# Altium PCB Embedded_board.PcbDoc (part 1 of 2)
Units mil, origin at the board's own origin, x right, y up, seen from the top; angles counter-clockwise.
Board outline 9840 x 5512.03 mil, 4 copper layers (Top Layer, Ground, Power, Bottom Layer); 264 components, 205 nets, 936 pads, 244 vias.
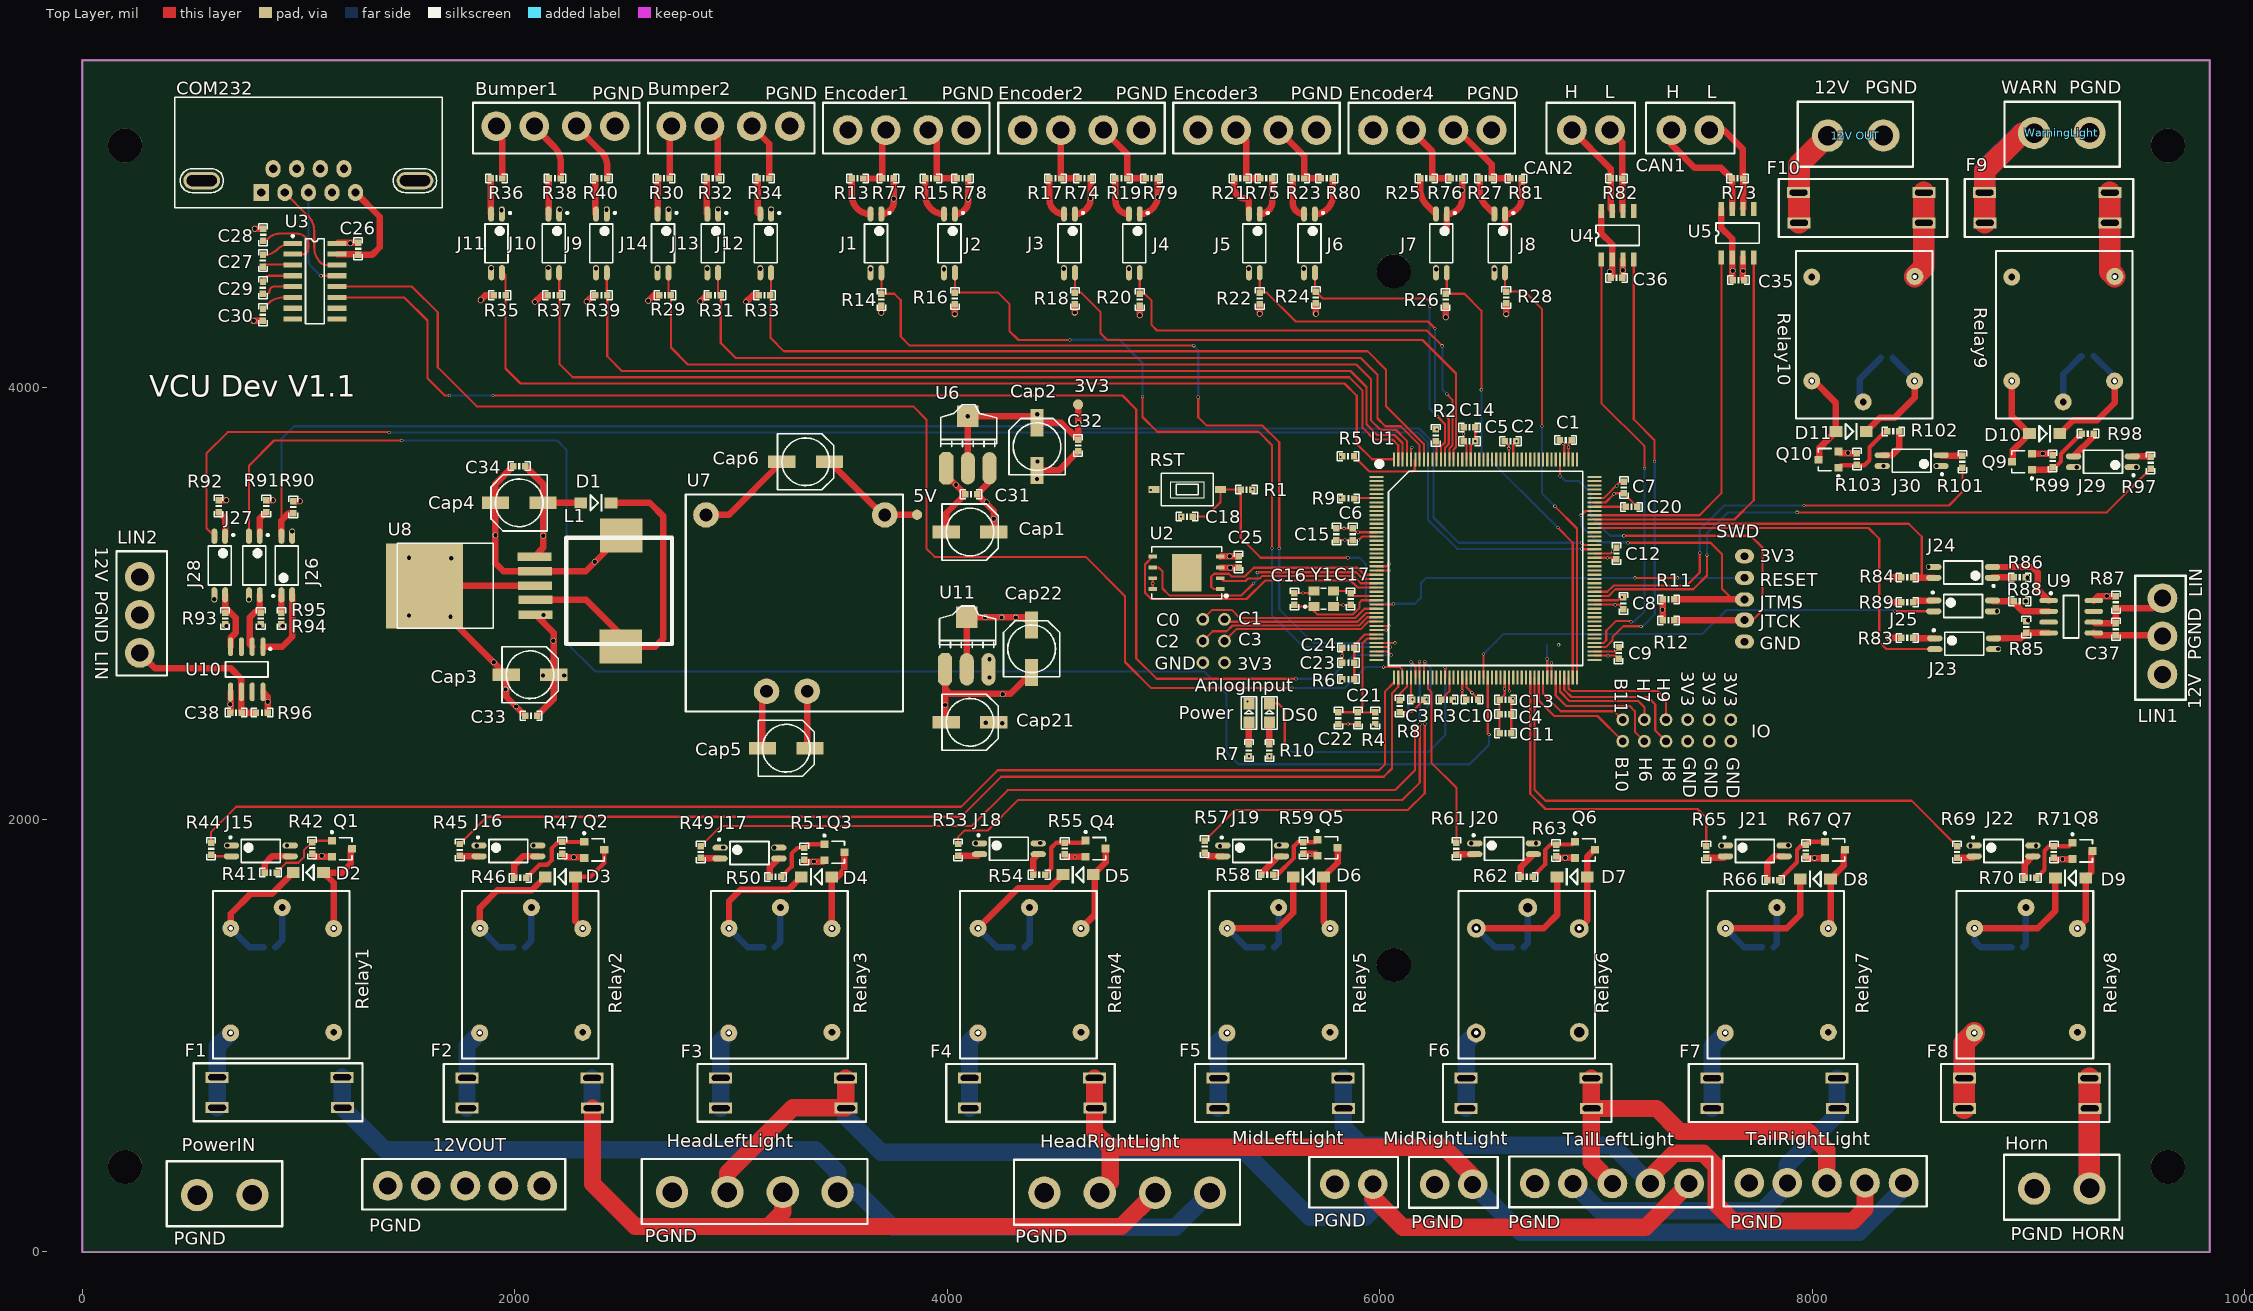
[diagram p0: Top Layer view]
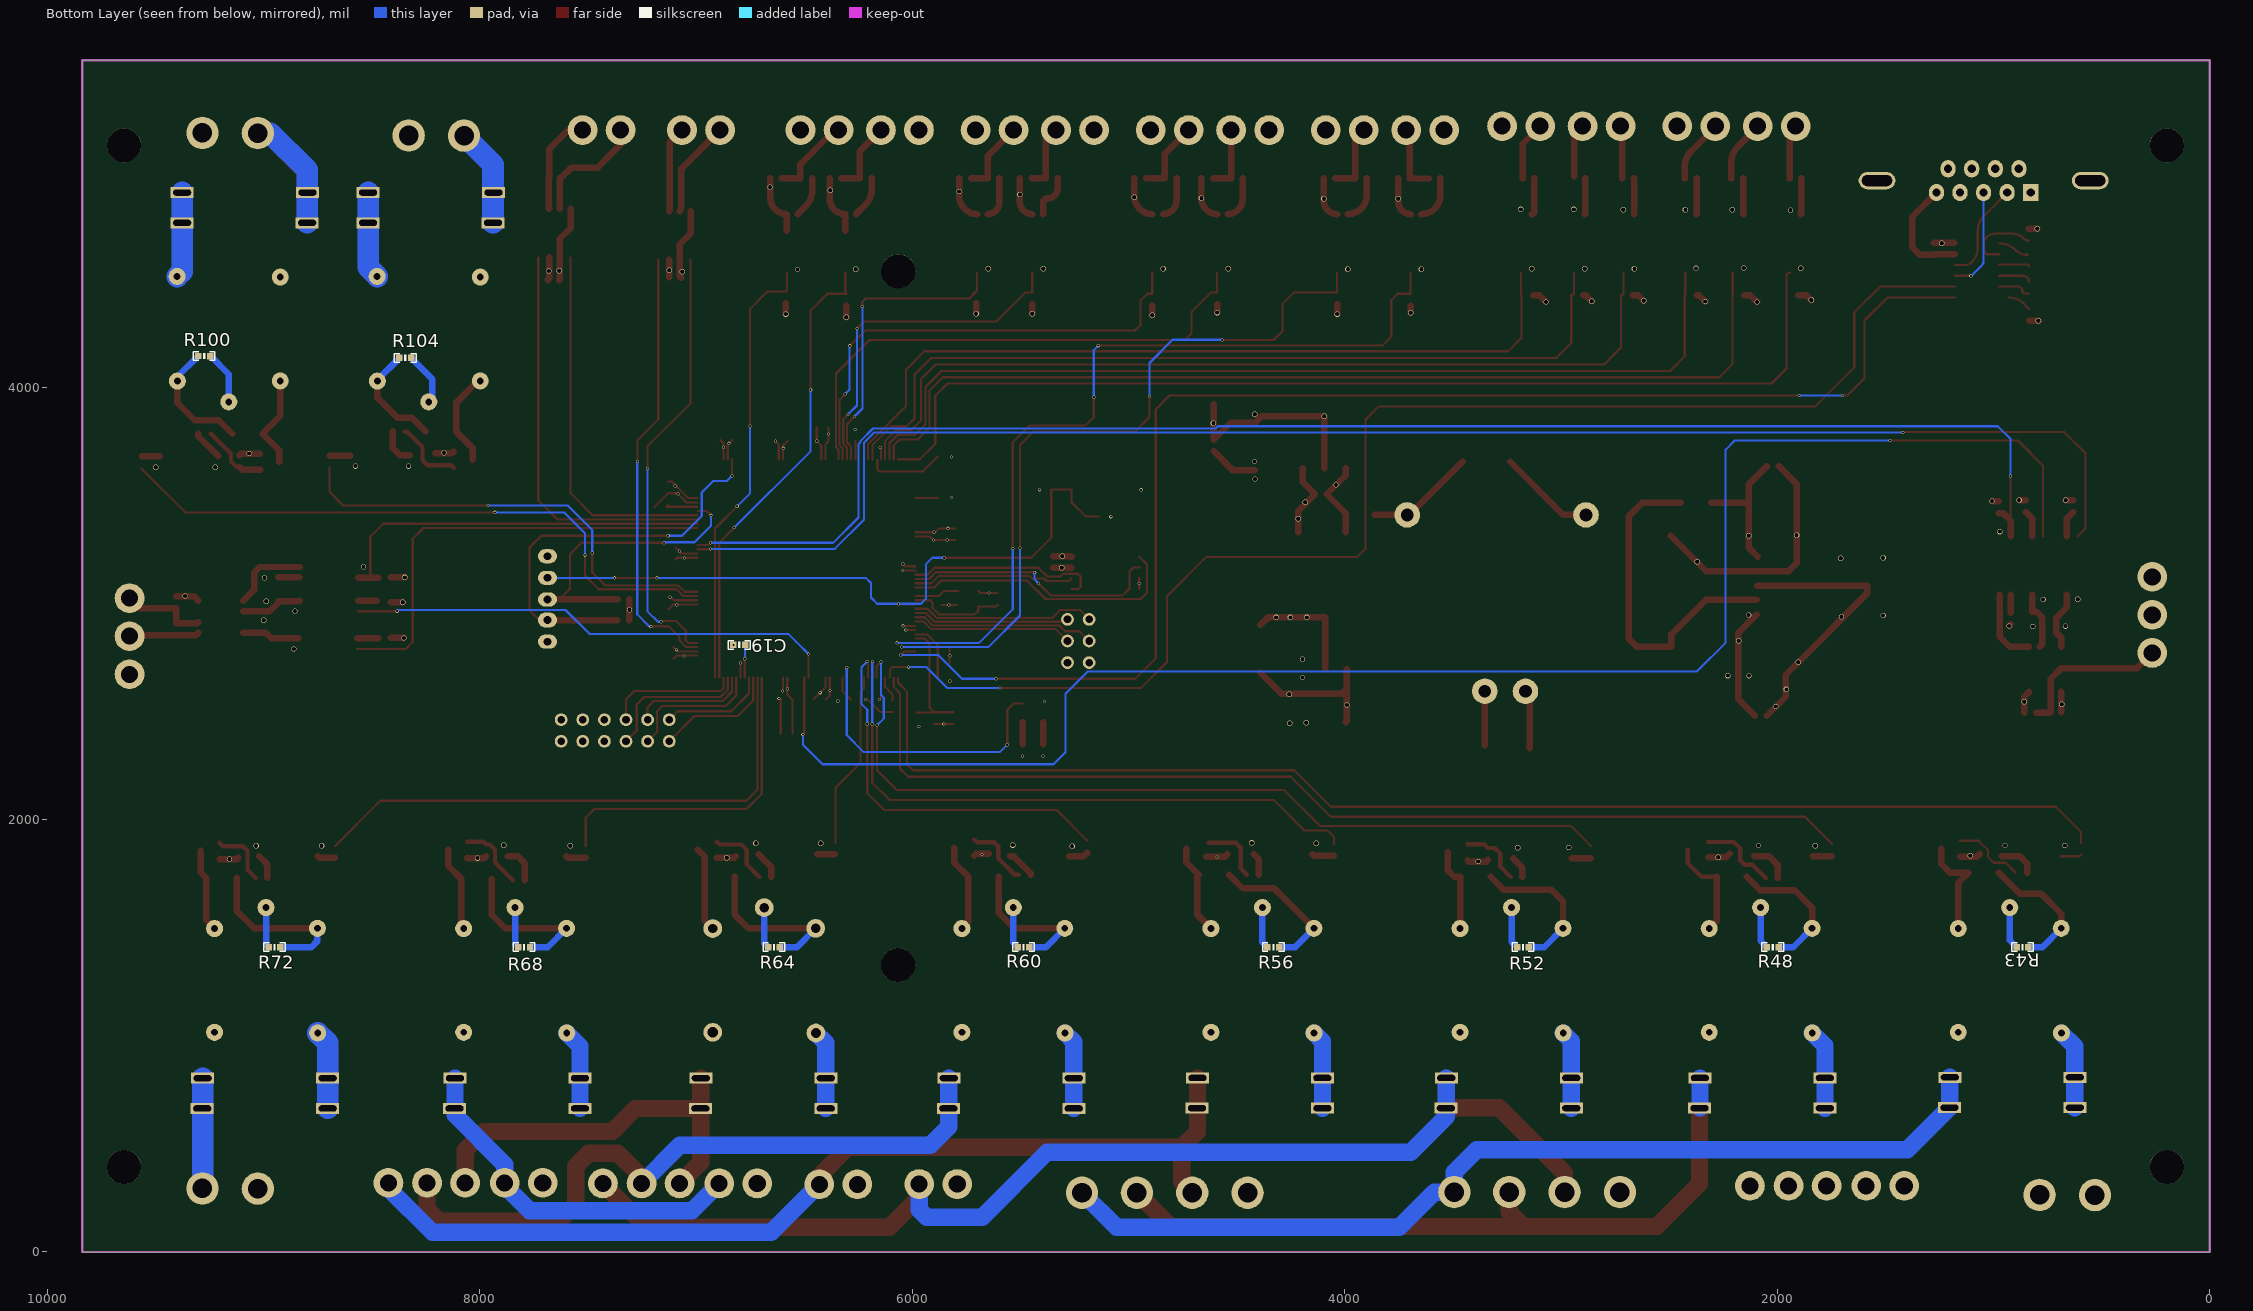
[diagram p1: Bottom Layer view, seen from below]
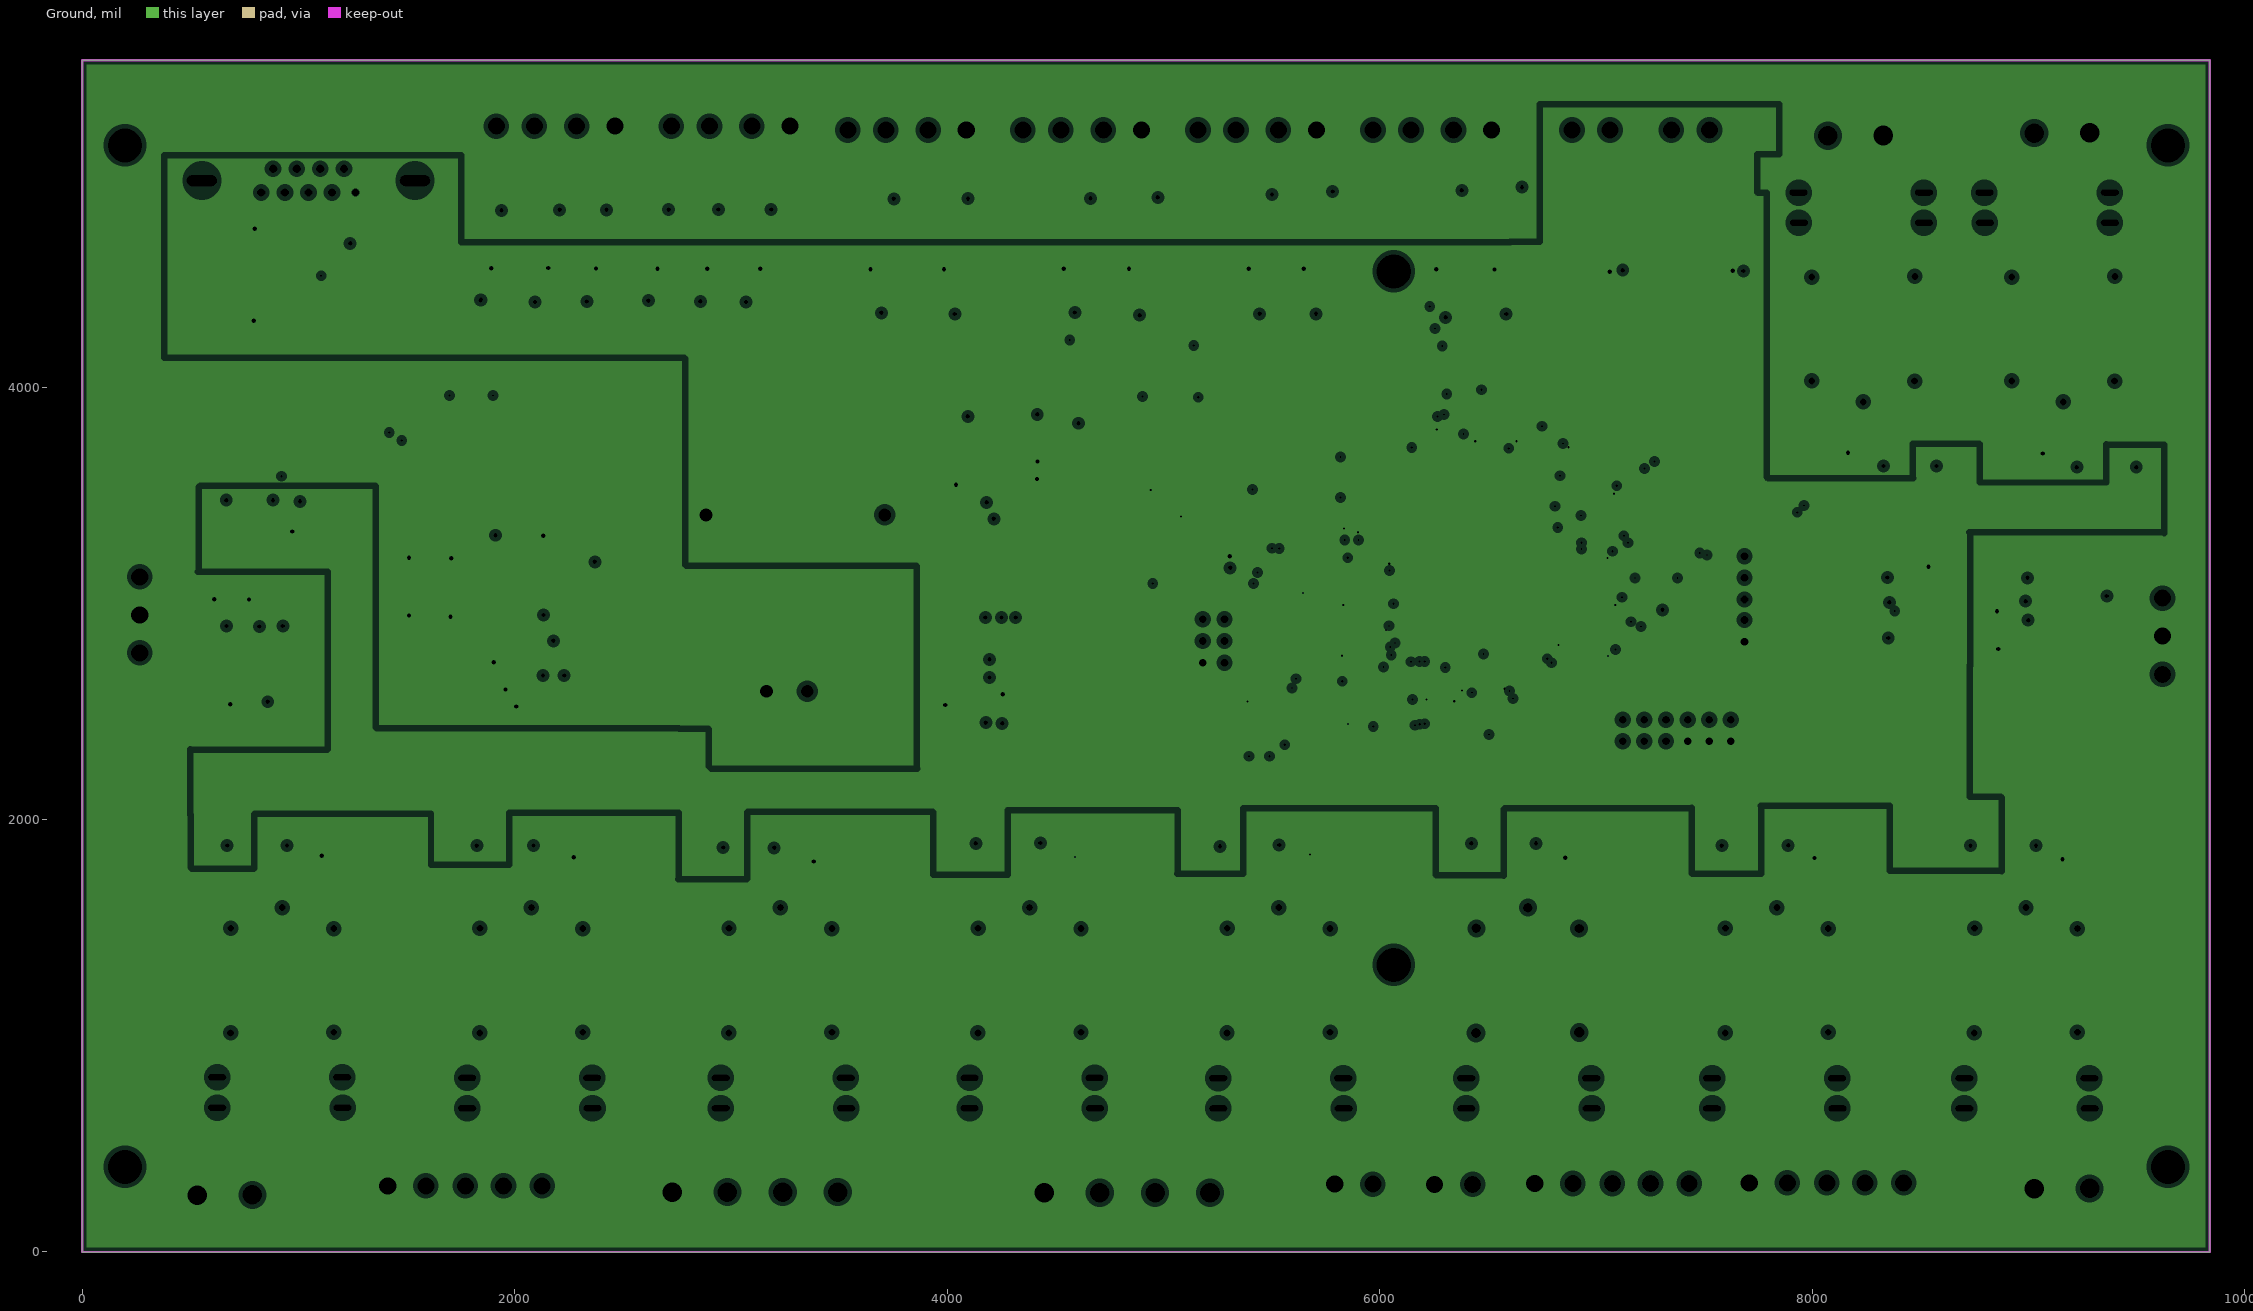
[diagram p2: Ground, clearances drawn from the general rule]
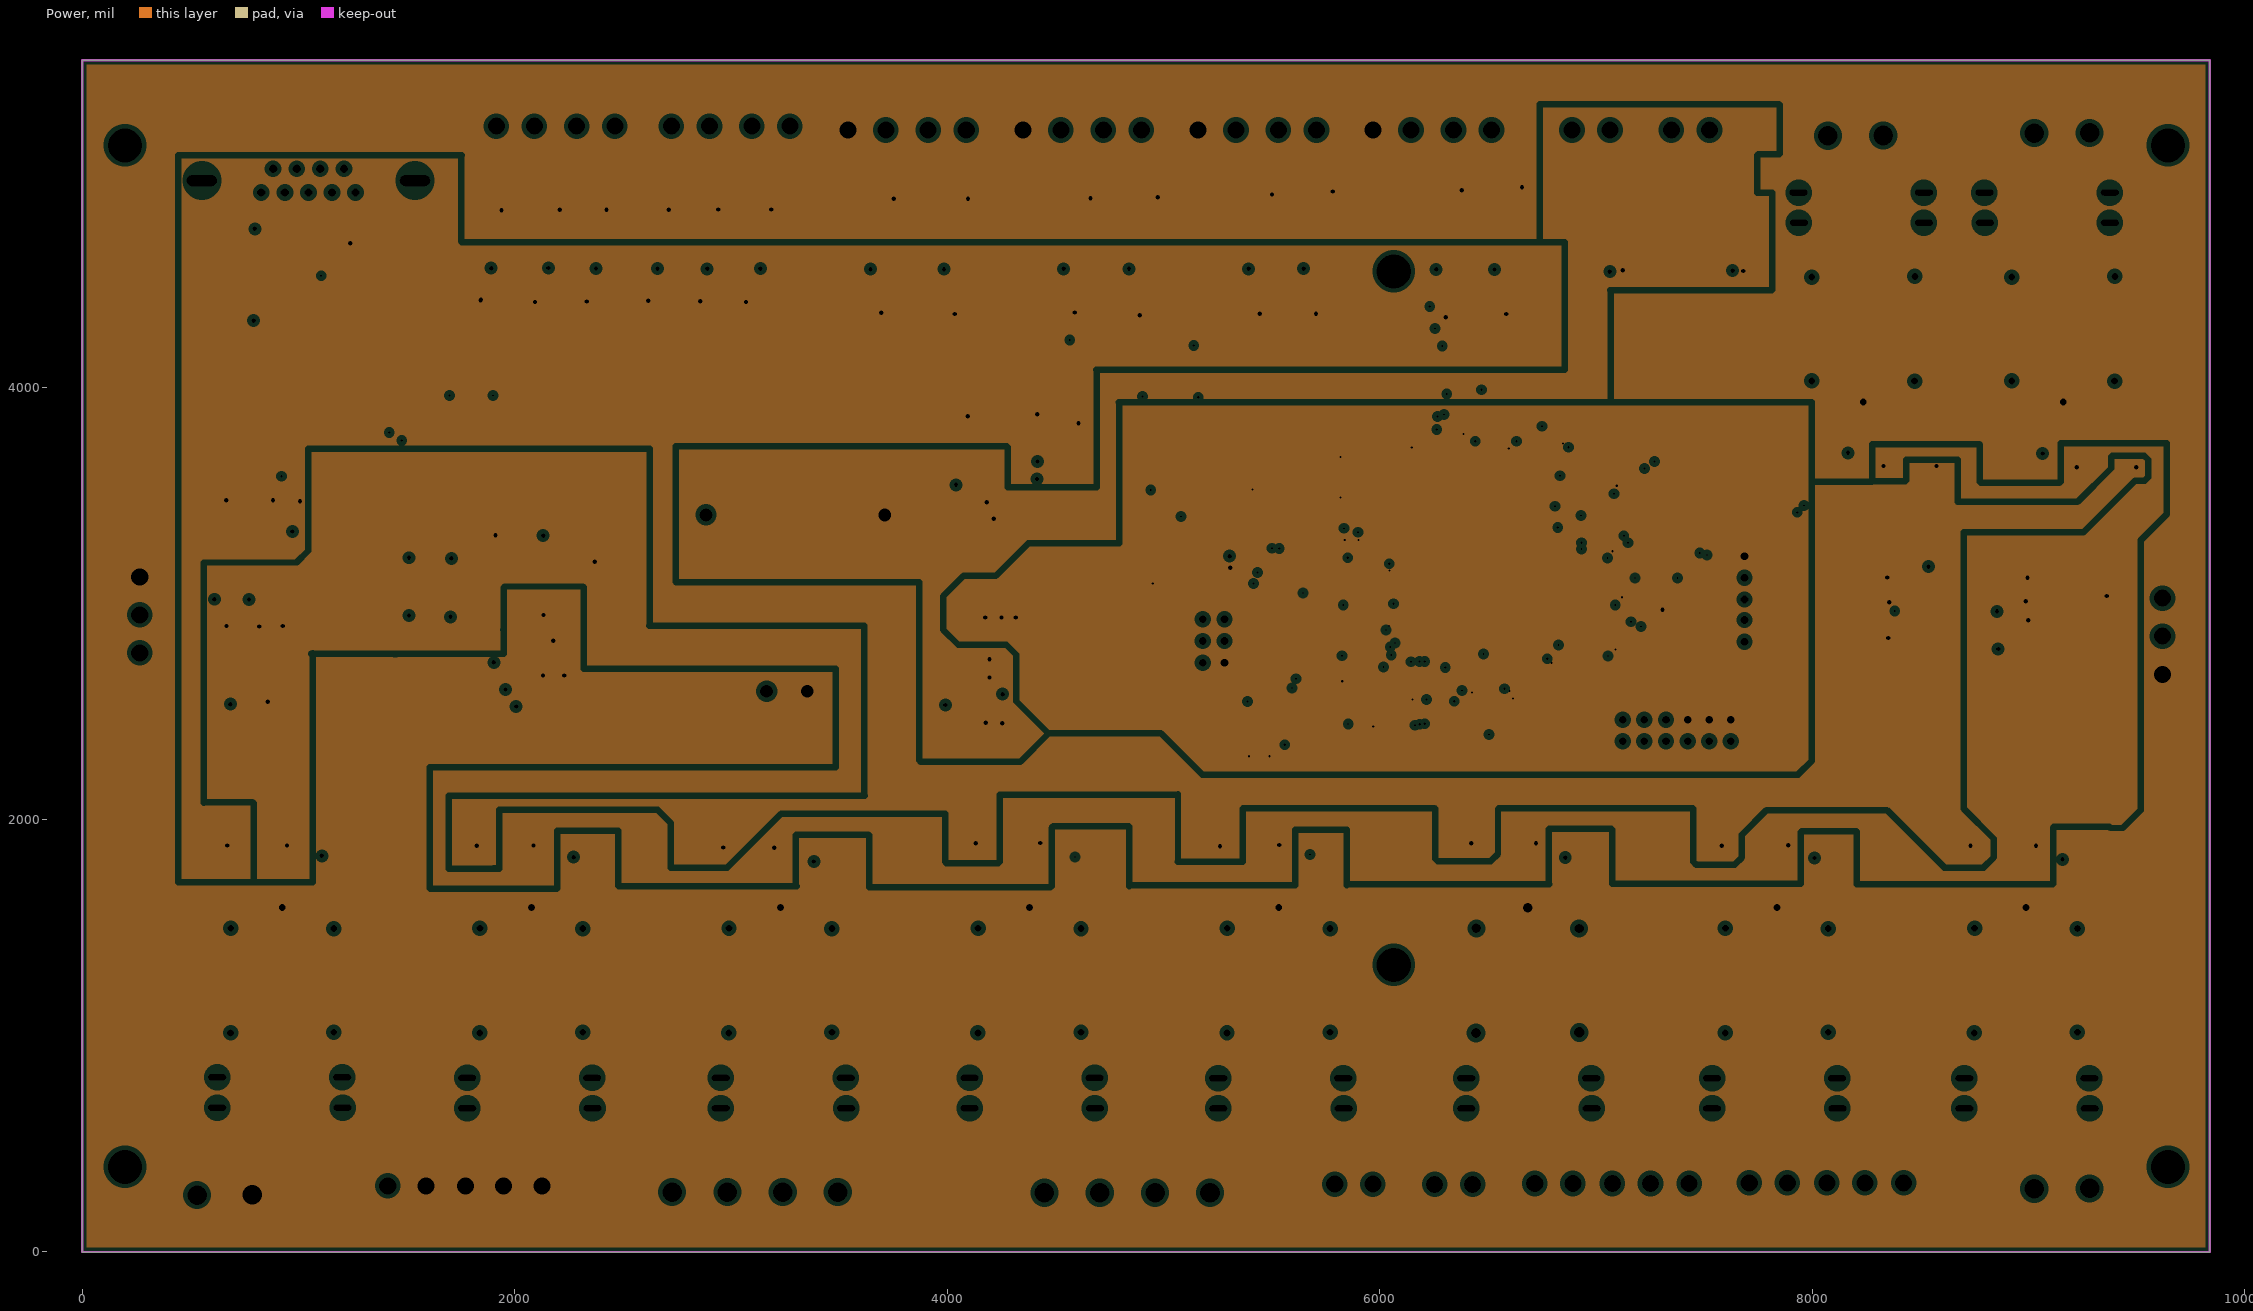
[diagram p3: Power, clearances drawn from the general rule]

## Layer stack, top to bottom
Top Layer: signal copper 1.4
Dielectric: core 12.6, FR-4, Dk 4.8
Ground: plane copper 1.4, net (Multiple Nets)
Dielectric: prepreg 12.6, FR-4, Dk 4.8
Power: plane copper 1.4, net (Multiple Nets)
Dielectric: core 12.6, FR-4, Dk 4.8
Bottom Layer: signal copper 1.4

## Board outline
-1.03,1.03 0.03,-0.03 9838.97,-0.03 9838.97,5512 -1.03,5512

## Design rules (kind name [scope] priority, off if disabled: settings)
Clearance [All] p1: gap=7
PlaneClearance [All] p1: clearance=20
PlaneConnect [All] p1: planeconnectstyle=Relief reliefexpansion=20 reliefentries=4 reliefconductorwidth=10 reliefairgap=10
PolygonConnect [All] p1: connectstyle=Relief reliefconductorwidth=10 reliefentries=4 polygonreliefangle="90 Angle" airgapwidth=10
RoutingVias [All] p1: holewidth=28 width=50 viastyle="Through Hole" minholewidth=28 minwidth=50 maxholewidth=28 maxwidth=50
SolderMaskExpansion [All] p1: expansion=4
Width [All] p1: maxlimit=100 minlimit=10 preferedwidth=30 minimp=50.000000 maximp=50.000000 favimp=50.000000
26 further rules are at their usual default settings.

## Classes and differential pairs
component class Communicate_module: C35 C36 C37 C38 CAN1 CAN2 J23 J24 J25 J26 J27 J28 LIN1 LIN2 R73 R82 R83 R84 R85 R86 R87 R88 R89 R90 R91 R92 R93 R94 R95 R96 U4 U5 U9 U10
component class Pwoer_module: 3V3 5V 12VOUT C31 C32 C33 C34 Cap1 Cap2 Cap3 Cap4 Cap5 Cap6 Cap21 Cap22 D1 L1 PowerIN U6 U7 U8 U11
component class Relay_module: "12V OUT" D2 D3 D4 D5 D6 D7 D8 D9 D10 D11 F1 F2 F3 F4 F5 F6 F7 F8 F9 F10 HeadLeftLight HeadRightLight Horn J15 J16 J17 J18 J19 J20 J21 J22 J29 J30 MidLeftLight MidRightLight Q1 Q2 Q3 Q4 Q5 Q6 Q7 Q8 Q9 Q10 R41 R42 R43 R44 R45 R46 R47 R48 R49 R50 R51 R52 R53 R54 R55 R56 R57 R58 R59 R60 R61 R62 R63 R64 R65 R66 R67 R68 R69 R70 R71 R72 R97 R98 R99 R100 R101 R102 R103 R104 Relay1 Relay2 Relay3 Relay4 Relay5 Relay6 Relay7 Relay8 Relay9 Relay10 TailLeftLight TailRightLight WarningLight
component class Sensor_module: Bumper1 Bumper2 Encoder1 Encoder2 Encoder3 Encoder4 J1 J2 J3 J4 J5 J6 J7 J8 J9 J10 J11 J12 J13 J14 R13 R14 R15 R16 R17 R18 R19 R20 R21 R22 R23 R24 R25 R26 R27 R28 R29 R30 R31 R32 R33 R34 R35 R36 R37 R38 R39 R40 R74 R75 R76 R77 R78 R79 R80 R81
component class STM32F429_minimum_system: AnlogInput C1 C2 C3 C4 C5 C6 C7 C8 C9 C10 C11 C12 C13 C14 C15 C16 C17 C18 C19 C20 C21 C22 C23 C24 C25 C26 C27 C28 C29 C30 COM232 DS0 IO Power R1 R2 R3 R4 R5 R6 R7 R8 R9 R10 R11 R12 RST SWD U1 U2 U3 Y1

## Components (designator, comment, footprint, x,y, rotation, side; value= is the part's Value field where it differs from the comment)
3V3 "TEST POINT" TP-1.5 4605,3920 r90 top
5V "TEST POINT" TP-1.5 3860,3410 r0 top
"12V OUT" "63080-2P" 63038-2P 7893,5320 r0 top
12VOUT "5566-5P" 5566-5P 1295,429 r0 top
AnlogInput "排针Header 3X2" F-HEADER-2*3-2.54MM 5182,2926 r0 top
Bumper1 "5566-4P" 5566-4P 2580,5082 r180 top
Bumper2 "5566-4P" 5566-4P 3389.8,5082 r180 top
C1 "104" 0603P 6860,3755 r180 top
C2 "104" 0603P 6605,3750 r180 top
C3 "104" 0603P 6179,2555 r180 top
C4 "104" 0603P 6581,2488 r0 top
C5 "104" 0603P 6415,3750 r180 top
C6 "104" 0603P 5875,3320 r270 top
C7 "104" 0603P 7129,3536 r90 top
C8 "104" 0603P 7127,3000 r90 top
C9 "104" 0603P 7105,2770 r90 top
C10 "104" 0603P 6427,2555 r0 top
C11 "104" 0603P 6581,2399 r0 top
C12 "104" 0603P 7095,3230 r90 top
C13 "104" 0603P 6581,2554 r0 top
C14 "104" 0603P 6415,3814 r180 top
C15 "104" 0603P 5800,3320 r270 top
C16 "22" 0603P 5605,3020 r90 top
C17 "22" 0603P 5865,3020 r270 top
C18 "104" 0603P 5109,3401 r180 top
C19 "225" 0603P 6800,2808 r0 bottom
C20 "225" 0603P 7164,3446 r0 top
C21 "104" 0603P 5899,2469 r90 top
C22 "10uf" 0603P 5809,2469 r90 top
C23 "104" 0603P 5855,2725 r180 top
C24 "225" 0603P 5855,2795 r180 top
C25 "104" 0603P 5347,3191 r90 top
C26 "104" 0603P 1275,4640 r90 top
C27 "104" 0603P 835,4585 r270 top
C28 "104" 0603P 835,4705 r90 top
C29 "104" 0603P 835,4460 r270 top
C30 "104" 0603P 835,4335 r270 top
C31 "104" 0603P 4110,3505 r0 top
C32 "104" 0603P 4605,3730 r90 top
C33 "104" 0603P 2075,2480 r0 top
C34 "104" 0603P 2020,3635 r180 top
C35 "104" 0603P 7660,4495 r180 top
C36 "104" 0603P 7095,4505 r0 top
C37 "1nF" 0603P 9405,2880 r90 top
C38 "1nF" 0603P 710,2495 r0 top
CAN1 "Header 2" 5566-2P 7231,5315 r0 top
CAN2 "Header 2" 5566-2P 6771,5315 r0 top
Cap1 "100uF" CC6.56.5 4105,3330 r180 top
Cap2 "100uF" CC6.56.5 4415,3725 r270 top
Cap3 "100uF" CC6.56.5 2070,2670 r180 top
Cap4 "100uF" CC6.56.5 2020,3465 r0 top
Cap5 "100uF" CC6.56.5 3255,2330 r180 top
Cap6 "100uF" CC6.56.5 3345,3655 r180 top
Cap21 "100uF" CC6.56.5 4105,2450 r180 top
Cap22 "100uF" CC6.56.5 4390,2790 r270 top
COM232 "DB9(母头)" DB9 1045,4900 r0 top
D1 "SS14" DIODE_SOP 2305,3465 r0 top
D2 "1N4148" DIODE_SOP 1115,1755 r180 top
D3 "1N4148" DIODE_SOP 2280,1735 r180 top
D4 "1N4148" DIODE_SOP 3465,1735 r180 top
D5 "1N4148" DIODE_SOP 4675,1745 r180 top
D6 "1N4148" DIODE_SOP 5740,1735 r180 top
D7 "1N4148" DIODE_SOP 6960,1735 r180 top
D8 "1N4148" DIODE_SOP 8085,1725 r180 top
D9 "1N4148" DIODE_SOP 9265,1730 r180 top
D10 "1N4148" DIODE_SOP 9005,3785 r0 top
D11 "1N4148" DIODE_SOP 8110,3795 r0 top
DS0 "LED绿色" SMDLED 5490,2450 r90 top
Encoder1 "5566-4P" 5566-4P 3421.6,5314 r0 top
Encoder2 "5566-4P" 5566-4P 4231.4,5314 r0 top
Encoder3 "5566-4P" 5566-4P 5041.2,5314 r0 top
Encoder4 "5566-4P" 5566-4P 5851,5314 r0 top
F1 "5A" 汽车保险丝座子 515,872.72 r0 top
F2 "5A保险丝座" 汽车保险丝座子 1671,870 r0 top
F3 "5A保险丝座" 汽车保险丝座子 2844,870 r0 top
F4 "5A保险丝座" 汽车保险丝座子 3995,870 r0 top
F5 "5A保险丝座" 汽车保险丝座子 5145,869 r0 top
F6 "5A保险丝座" 汽车保险丝座子 6292,869 r0 top
F7 "5A保险丝座" 汽车保险丝座子 7429,869 r0 top
F8 "5A保险丝座" 汽车保险丝座子 8596,869 r0 top
F9 "5A保险丝座" 汽车保险丝座子 9485,4695 r180 top
F10 "5A保险丝座" 汽车保险丝座子 8625,4695 r180 top
HeadLeftLight "63080-4P" 63080-4P 2588,430 r0 top
HeadRightLight "63080-4P" 63080-4P 4310,427 r0 top
Horn "63080-2P" 63038-2P 8847,450 r0 top
IO "排针Header 6X2" F-HEADER-2*6-2.54MM 7124,2362 r90 top
J1 "光耦" SOP127P710X350-4N 3670,4665 r270 top
J2 "光耦" SOP127P710X350-4N 4010,4665 r270 top
J3 "光耦" SOP127P710X350-4N 4565,4665 r270 top
J4 "光耦" SOP127P710X350-4N 4865,4665 r270 top
J5 "光耦" SOP127P710X350-4N 5420,4665 r270 top
J6 "光耦" SOP127P710X350-4N 5675,4665 r270 top
J7 "光耦" SOP127P710X350-4N 6285,4665 r270 top
J8 "光耦" SOP127P710X350-4N 6555,4665 r270 top
J9 "光耦" SOP127P710X350-4N 2400,4665 r270 top
J10 "光耦" SOP127P710X350-4N 2180,4665 r270 top
J11 "光耦" SOP127P710X350-4N 1915,4665 r270 top
J12 "光耦" SOP127P710X350-4N 3160,4665 r270 top
J13 "光耦" SOP127P710X350-4N 2915,4665 r270 top
J14 "光耦" SOP127P710X350-4N 2685,4665 r270 top
J15 "光耦" SOP127P710X350-4N 825,1855 r0 top
J16 "光耦" SOP127P710X350-4N 1970,1855 r0 top
J17 "光耦" SOP127P710X350-4N 3085,1845 r0 top
J18 "光耦" SOP127P710X350-4N 4285,1865 r0 top
J19 "光耦" SOP127P710X350-4N 5410,1855 r0 top
J20 "光耦" SOP127P710X350-4N 6575,1865 r0 top
J21 "光耦" SOP127P710X350-4N 7735,1855 r0 top
J22 "光耦" SOP127P710X350-4N 8885,1855 r0 top
J23 "光耦" SOP127P710X350-4N 8703.23,2813.15 r0 top
J24 "光耦" SOP127P710X350-4N 8698.23,3143.15 r180 top
J25 "光耦" SOP127P710X350-4N 8698.23,2988.15 r0 top
J26 "光耦" SOP127P710X350-4N 945,3175 r90 top
J27 "光耦" SOP127P710X350-4N 795,3175 r270 top
J28 "光耦" SOP127P710X350-4N 635,3175 r270 top
J29 "光耦" SOP127P710X350-4N 9345,3655 r180 top
J30 "光耦" SOP127P710X350-4N 8460,3660 r180 top
L1 "6电感" 电感-10*10 2480,3060 r90 top
LIN1 "5566-3P" 5566-3P 9495,2555 r90 top
LIN2 "5566-3P" 5566-3P 390,3240 r270 top
MidLeftLight "5566-2P" 5566-2P 5674,440 r0 top
MidRightLight "5566-2P" 5566-2P 6136,439 r0 top
Power "LED红色" SMDLED 5395,2450 r90 top
PowerIN "63080-2P" 63038-2P 350,420 r0 top
Q1 "S8050" SOT-23R 1195,1865 r270 top
Q2 "S8050" SOT-23R 2362,1860 r270 top
Q3 "S8050" SOT-23R 3473,1849 r270 top
Q4 "S8050" SOT-23R 4681,1866 r270 top
Q5 "S8050" SOT-23R 5754,1870 r270 top
Q6 "S8050" SOT-23R 6945,1860 r270 top
Q7 "S8050" SOT-23R 8100,1860 r270 top
Q8 "S8050" SOT-23R 9245,1855 r270 top
Q9 "S8050" SOT-23R 8975,3655 r90 top
Q10 "S8050" SOT-23R 8080,3665 r90 top
R1 "10K" 0603P 5384,3526 r0 top
R2 "100K" 0603P 6259,3777 r90 top
R3 "100K" 0603P 6311,2555 r0 top
R4 "10R" 0603P 5979,2469 r270 top
R5 "0R" 0603P 5854,3680 r180 top
R6 "1M" 0603P 5855,2650 r180 top
R7 "510" 0603P 5395,2320 r90 top
R8 "10K" 0603P 6092,2525 r270 top
R9 "0R" 0603P 5855,3485 r180 top
R10 "510" 0603P 5490,2320 r90 top
R11 "10K" 0603P 7336,3018 r180 top
R12 "10K" 0603P 7336,2921 r180 top
R13 "750" 0603P 3585,4965 r180 top
R14 "1K" 0603P 3695,4405 r270 top
R15 "750" 0603P 3925,4965 r180 top
R16 "1K" 0603P 4035,4410 r270 top
R17 "750" 0603P 4500,4965 r180 top
R18 "1K" 0603P 4590,4410 r270 top
R19 "750" 0603P 4805,4965 r180 top
R20 "1K" 0603P 4890,4405 r270 top
R21 "750" 0603P 5355,4965 r180 top
R22 "1K" 0603P 5445,4410 r270 top
R23 "750" 0603P 5625,4965 r180 top
R24 "1K" 0603P 5705,4415 r270 top
R25 "750" 0603P 6215,4965 r180 top
R26 "1K" 0603P 6305,4405 r270 top
R27 "750" 0603P 6490,4965 r180 top
R28 "1K" 0603P 6585,4415 r270 top
R29 "4.7K" 0603P 2695,4425 r180 top
R30 "330" 0603P 2690,4965 r180 top
R31 "4.7K" 0603P 2925,4425 r180 top
R32 "330" 0603P 2915,4965 r180 top
R33 "4.7K" 0603P 3155,4425 r180 top
R34 "330" 0603P 3150,4965 r180 top
R35 "4.7K" 0603P 1930,4425 r180 top
R36 "330" 0603P 1915,4965 r180 top
R37 "4.7K" 0603P 2180,4425 r180 top
R38 "330" 0603P 2185,4965 r180 top
R39 "4.7K" 0603P 2400,4425 r180 top
R40 "330" 0603P 2400,4965 r180 top
R41 "2.2K" 0603P 870,1755 r0 top
R42 "10K" 0603P 1062,1868 r90 top
R43 "100" 0603P 865,1410 r0 bottom
R44 "100" 0603P 595,1865 r270 top
R45 "100" 0603P 1745,1860 r270 top
R46 "2.2K" 0603P 2025,1730 r0 top
R47 "10K" 0603P 2219,1869 r90 top
R48 "100" 0603P 2020,1410 r0 bottom
R49 "100" 0603P 2860,1850 r270 top
R50 "2.2K" 0603P 3205,1735 r0 top
R51 "10K" 0603P 3338,1841 r90 top
R52 "100" 0603P 3175,1410 r0 bottom
R53 "100" 0603P 4050,1860 r270 top
R54 "2.2K" 0603P 4425,1745 r0 top
R55 "10K" 0603P 4543,1866 r90 top
R56 "100" 0603P 4330,1410 r0 bottom
R57 "100" 0603P 5190,1875 r270 top
R58 "2.2K" 0603P 5480,1745 r0 top
R59 "10K" 0603P 5647,1868 r90 top
R60 "100" 0603P 5485,1410 r0 bottom
R61 "100" 0603P 6355,1865 r270 top
R62 "2.2K" 0603P 6680,1735 r0 top
R63 "10K" 0603P 6816,1857 r90 top
R64 "100" 0603P 6640,1410.13 r180 bottom
R65 "100" 0603P 7510,1850 r90 top
R66 "2.2K" 0603P 7820,1720 r0 top
R67 "10K" 0603P 7971,1857 r90 top
R68 "100" 0603P 7795,1410 r0 bottom
R69 "100" 0603P 8670,1850 r270 top
R70 "2.2K" 0603P 9010,1730 r180 top
R71 "10K" 0603P 9118,1850 r270 top
R72 "100" 0603P 8950,1410.13 r180 bottom
R73 "120" 0603P 7655,4965 r180 top
R74 "4.7K" 0603P 4635,4965.13 r0 top
R75 "4.7K" 0603P 5475,4965.13 r0 top
R76 "4.7K" 0603P 6355,4965.13 r0 top
R77 "4.7K" 0603P 3725,4965.13 r0 top
R78 "4.7K" 0603P 4070,4965.13 r0 top
R79 "4.7K" 0603P 4945,4965.13 r0 top
R80 "4.7K" 0603P 5755,4965.13 r0 top
R81 "4.7K" 0603P 6630,4965.13 r0 top
R82 "120" 0603P 7095,4965 r180 top
R83 "100" 0603P 8440,2840 r0 top
R84 "100" 0603P 8440,3120 r0 top
R85 "100" 0603P 8990,2890 r90 top
R86 "330" 0603P 8960,3120 r0 top
R87 "1K" 0603P 9405,3005 r90 top
R88 "4.7K" 0603P 8960,3010 r0 top
R89 "100" 0603P 8440,3005 r0 top
R90 "100" 0603P 975,3445 r270 top
R91 "100" 0603P 850,3450 r270 top
R92 "100" 0603P 630,3450 r270 top
R93 "100" 0603P 660,2930 r270 top
R94 "4.7K" 0603P 825,2930 r270 top
R95 "330" 0603P 920,2930 r270 top
R96 "1K" 0603P 830,2495 r180 top
R97 "100" 0603P 9565,3650 r90 top
R98 "2.2K" 0603P 9275,3785 r180 top
R99 "10K" 0603P 9112,3658 r270 top
R100 "100" 0603P 9275,4144 r0 bottom
R101 "100" 0603P 8695,3655 r270 top
R102 "2.2K" 0603P 8375,3795 r0 top
R103 "10K" 0603P 8207,3667 r90 top
R104 "100" 0603P 8345,4135 r180 bottom
Relay1 "继电器" SRD-12VDC#1 1210,1670 r270 top (schematic designator 继电器1)
Relay2 "继电器" SRD-12VDC#1 2362.14,1670 r270 top
Relay3 "继电器" SRD-12VDC#1 3514.29,1670 r270 top
Relay4 "继电器" SRD-12VDC#1 4666.43,1670 r270 top
Relay5 "继电器" SRD-12VDC#1 5818.57,1670 r270 top
Relay6 "继电器" SRD-12VDC#2 6970.71,1670 r270 top
Relay7 "继电器" SRD-12VDC#1 8122.86,1670 r270 top
Relay8 "继电器" SRD-12VDC#1 9275,1670 r270 top (schematic designator 继电器8)
Relay9 "继电器" SRD-12VDC#1 8875,3855 r90 top
Relay10 "继电器" SRD-12VDC#1 7950,3855 r90 top
RST "KEY_M" KEY_SOP3625 5264,3526 r180 top
SWD "XH2.54接插件-5P" F-HEADER-5-2.54MM 7687,3118 r0 top
TailLeftLight "5566-5P" 5566-5P 6600,440 r0 top
TailRightLight "5566-5P" 5566-5P 7592,443 r0 top
U1 "STM32F429IGT6" LQFP176 5985,3585 r0 top
U2 "W25Q256" WSON8 5107,3141 r180 top
U3 "SP3232" SOP16M 1075,4490 r270 top
U4 "TJA1050" SOP-8 7025,4590 r90 top
U5 "TJA1050" SOP-8 7580,4600 r90 top
U6 "AMS1117-3.3" AMS1117 3995,3625 r0 top
U7 "12V转5V隔离电源" WRB1205MH 3795,2500 r90 top
U8 "稳压LM2596" TO-263-5 1455,2885 r90 top
U9 "TJA1020T" NSO8_N 9198.23,2938.15 r0 top
U10 "TJA1020T" NSO8_N 760,2695 r270 top
U11 "AMS1117-3.3" AMS1117 3990,2695 r0 top
WarningLight "63080-2P" 63038-2P 9463,5019 r180 top
Y1 "25Mhz" XTAL3225 5695,2985 r0 top

## Footprints (in the part's own frame and the unit in brackets; to place one, negate y for a bottom-side part, rotate by r counter-clockwise, add the part's x,y. Pads: shape width x height; smd on the part's side, far side on the other; paste and mask are expansions set on the pad)
0603P [mil]
  rect 30x30 smd: 1(-27,0) 2(27.5,-0.06)
  silkscreen extent -50,-20 50,20
5566-2P [mm]
  round 3.5 hole 2: 1(2.997,-3.2) 2(7.468,-3.2)
  silkscreen extent 0,-5.94 10.41,0
5566-3P [mm]
  round 3.5 hole 2: 1(2.972,-3.175) 2(7.442,-3.175) 3(11.913,-3.175)
  silkscreen extent -0.03,-5.92 14.55,0.03
5566-4P [mm]
  round 3.5 hole 2: 1(2.997,-3.175) 2(7.468,-3.175) 3(12.446,-3.175) 4(16.916,-3.175)
  silkscreen extent 0.1,-5.92 19.66,0.03
5566-5P [mm]
  round 3.5 hole 2: 1(2.972,-3.124) 2(7.442,-3.124) 3(12.09,-3.124) 4(16.561,-3.124) 5(21.107,-3.124)
  silkscreen extent -0.03,-5.92 23.83,0.03
63038-2P [mm]
  round 3.8 hole 2.3: 1(4.572,-3.988) 2(11.074,-3.962)
  silkscreen extent 1.02,-7.65 14.58,0
63080-4P [mm]
  round 3.8 hole 2.3: 1(3.531,-3.886) 2(10.033,-3.886) 3(16.535,-3.886) 4(22.987,-3.886)
  silkscreen extent -0.03,-7.65 26.49,0
AMS1117 [mil]
  oct 65x150 smd: 1(0.03,-0.06)
  oval 65x150 smd: 2(100.03,-0.06) 3(200.03,-0.06)
  rect 100x100 smd: 4(100.03,239.94)
  silkscreen extent -26,100 234,293
CC6.56.5 [mm]
  rect 3.2x1.5 smd: 1(-2.794,0) 2(2.8,0)
  silkscreen extent -3.3,-3.3 3.3,3.3
DB9 [mil]
  oval 170x80 hole 50 slot 140 at 0 deg: 0(-493,55) 0(493,55)
  rect 70x80 hole 38: 1(-218,0)
  oval 70x80 hole 38: 2(-109,0) 3(0,0) 4(109,0) 5(218,0) 6(-163,110) 7(-54,110) 8(55,110) 9(164,110)
  silkscreen extent -618,-70 618,440
DIODE_SOP [mm]
  rect 1.5x1.3 smd: 1(0,0) 2(3.556,0)
  silkscreen extent 1.14,-1.02 2.56,1.02
F-HEADER-2*3-2.54MM [mm]
  round 1.5 hole 0.9: 1(0,0) 2(2.54,0) 3(0,-2.54) 4(2.54,-2.54) 5(0,-5.08) 6(2.54,-5.08)
  body extent -1.23,-6.47 3.77,1.4, height 9
F-HEADER-2*6-2.54MM [mm]
  round 1.5 hole 0.9: 1(0,0) 2(2.54,0) 3(0,-2.54) 4(2.54,-2.54) 5(0,-5.08) 6(2.54,-5.08) 7(0,-7.62) 8(2.54,-7.62) 9(0,-10.16) 10(2.54,-10.16) 11(0,-12.7) 12(2.54,-12.7)
  body extent -1.23,-14.1 3.77,1.39, height 9
F-HEADER-5-2.54MM [mm]
  oval 2.254x1.652 hole 0.9: 1(0,2.54) 2(0,0) 3(0,-2.54) 5(0,-7.493)
  oval 2.254x1.754 hole 0.9: 4(0,-4.953)
  body extent -1.25,-9.02 1.25,3.94, height 9
KEY_SOP3625 [mm]
  rect 1.3x0.8 smd: 1(0,0) 2(7.8,0)
  silkscreen extent 0.85,-1.9 6.95,1.9
LQFP176 [mm]
  rect 1.65x0.254 smd: 1(0,0) 2(0,-0.5) 3(0,-1) 4(0,-1.5) 5(0,-2) 6(0,-2.5) 7(0,-3) 8(0,-3.5) 9(0,-4) 10(0,-4.5) 11(0,-5) 12(0,-5.5) 13(0,-6) 14(0,-6.5) 15(0,-7) 16(0,-7.5) 17(0,-8) 18(0,-8.5) 19(0,-9) 20(0,-9.5) 21(0,-10) 22(0,-10.5) 23(0,-11) 24(0,-11.5) 25(0,-12) 26(0,-12.5) 27(0,-13) 28(0,-13.5) 29(0,-14) 30(0,-14.5) 31(0,-15) 32(0,-15.5) 33(0,-16) 34(0,-16.5) 35(0,-17) 36(0,-17.5) 37(0,-18) 38(0,-18.5) 39(0,-19) 40(0,-19.5) 41(0,-20) 42(0,-20.5) 43(0,-21) 44(0,-21.5) 89(25.631,-21.5) 90(25.631,-21) 91(25.631,-20.5) 92(25.631,-20) 93(25.631,-19.5) 94(25.631,-19) 95(25.631,-18.5) 96(25.631,-18) 97(25.631,-17.5) 98(25.631,-17) 99(25.631,-16.5) 100(25.631,-16) 101(25.631,-15.5) 102(25.631,-15) 103(25.631,-14.5) 104(25.631,-14) 105(25.631,-13.5) 106(25.631,-13) 107(25.631,-12.5) 108(25.631,-12) 109(25.631,-11.5) 110(25.631,-11) 111(25.631,-10.5) 112(25.631,-10) 113(25.631,-9.5) 114(25.631,-9) 115(25.631,-8.5) 116(25.631,-8) 117(25.631,-7.5) 118(25.631,-7) 119(25.631,-6.5) 120(25.631,-6) 121(25.631,-5.5) 122(25.631,-5) 123(25.631,-4.5) 124(25.631,-4) 125(25.631,-3.5) 126(25.631,-3) 127(25.631,-2.5) 128(25.631,-2) 129(25.631,-1.5) 130(25.631,-1) 131(25.631,-0.5) 132(25.631,0)
  rect 0.254x1.65 smd: 45(2.065,-23.566) 46(2.566,-23.566) 47(3.066,-23.566) 48(3.565,-23.566) 49(4.066,-23.566) 50(4.565,-23.566) 51(5.066,-23.566) 52(5.565,-23.566) 53(6.066,-23.566) 54(6.565,-23.566) 55(7.066,-23.566) 56(7.565,-23.566) 57(8.066,-23.566) 58(8.565,-23.566) 59(9.066,-23.566) 60(9.565,-23.566) 61(10.066,-23.566) 62(10.565,-23.566) 63(11.066,-23.566) 64(11.565,-23.566) 65(12.066,-23.566) 66(12.565,-23.566) 67(13.066,-23.566) 68(13.565,-23.566) 69(14.066,-23.566) 70(14.565,-23.566) 71(15.066,-23.566) 72(15.566,-23.566) 73(16.066,-23.566) 74(16.566,-23.566) 75(17.065,-23.566) 76(17.566,-23.566) 77(18.065,-23.566) 78(18.566,-23.566) 79(19.065,-23.566) 80(19.566,-23.566) 81(20.065,-23.566) 82(20.566,-23.566) 83(21.065,-23.566) 84(21.566,-23.566) 85(22.065,-23.566) 86(22.566,-23.566) 87(23.065,-23.566) 88(23.566,-23.566) 133(23.566,2.065) 134(23.065,2.065) 135(22.566,2.065) 136(22.065,2.065) 137(21.566,2.065) 138(21.065,2.065) 139(20.566,2.065) 140(20.065,2.065) 141(19.566,2.065) 142(19.065,2.065) 143(18.566,2.065) 144(18.065,2.065) 145(17.566,2.065) 146(17.065,2.065) 147(16.566,2.065) 148(16.066,2.065) 149(15.566,2.065) 150(15.066,2.065) 151(14.565,2.065) 152(14.066,2.065) 153(13.565,2.065) 154(13.066,2.065) 155(12.565,2.065) 156(12.066,2.065) 157(11.565,2.065) 158(11.066,2.065) 159(10.565,2.065) 160(10.066,2.065) 161(9.565,2.065) 162(9.066,2.065) 163(8.565,2.065) 164(8.066,2.065) 165(7.565,2.065) 166(7.066,2.065) 167(6.565,2.065) 168(6.066,2.065) 169(5.565,2.065) 170(5.066,2.065) 171(4.565,2.065) 172(4.066,2.065) 173(3.565,2.065) 174(3.066,2.065) 175(2.566,2.065) 176(2.065,2.065)
  silkscreen extent 0.04,-22.15 24.22,1.82
NSO8_N [mm] "SOIC-max660"
  oval 2.2x0.6 smd: 1(-2.654,1.905) 2(-2.654,0.635) 3(-2.654,-0.635) 4(-2.654,-1.905) 5(2.654,-1.905) 6(2.654,-0.635) 7(2.654,0.635) 8(2.654,1.905)
  silkscreen extent -2.52,-2.5 0.9,2.88, body extent -1.95,-2.45 1.95,2.45, height 1.75
SMDLED [mm]
  rect 1.4x1.27 smd: 1(0.001,-0.002) 2(2.211,-0.002)
  silkscreen extent -0.8,-0.89 3.01,0.89
SOP16M [mm]
  rect 0.6x2.2 smd: 1(-4.445,-2.6) 2(-3.175,-2.6) 3(-1.905,-2.6) 4(-0.635,-2.6) 5(0.635,-2.6) 6(1.905,-2.6) 7(3.175,-2.6) 8(4.445,-2.6) 9(4.445,2.6) 10(3.175,2.6) 11(1.905,2.6) 12(0.635,2.6) 13(-0.635,2.6) 14(-1.905,2.6) 15(-3.175,2.6) 16(-4.445,2.6)
  silkscreen extent -5.42,-2.72 5,1.1
SOP127P710X350-4N [mm] "SOP, 4-Leads, Body 2.7x4.5mm (max), Pitch 1.27mm, IPC Medium Density"
  oval 1.8x0.7 smd: 1(-3.448,0.635) 2(-3.448,-0.635) 3(3.448,-0.635) 4(3.448,0.635)
  silkscreen extent -3.7,-1.35 2.29,1.71, body extent -2.76,-1.35 2.79,1.35, height 3.5
SOP-8 [mil]
  rect 65x25 smd: 1(0,0) 2(0,-50) 3(0,-100) 4(0,-150) 5(224.41,-150) 6(224.41,-100) 7(224.41,-50) 8(224.41,0)
  silkscreen extent 65,-175 159,25
SOT-23R [mm]
  rect 0.9x0.95 smd: 1(0.95,-1.048) 2(-0.95,-1.048) 3(0,1.302)
  silkscreen extent -2.07,-1.17 1.3,1.3
SRD-12VDC#1 [mm]
  round 2 hole 0.8: 1(1.956,-7.264) 2(16.612,-1.219) 3(16.688,-13.335) 4(4.42,-1.219) 5(4.394,-13.31)
  silkscreen extent 0,-15.42 19.69,0.64
SRD-12VDC#2 [mm]
  round 2.2 hole 1.1: 1(1.956,-7.264) 4(4.42,-1.219) 5(4.394,-13.31)
  round 2.2 hole 1.2: 2(16.612,-1.219) 3(16.688,-13.335)
  silkscreen extent 0,-15.42 19.69,0.64
TO-263-5 [mil]
  rect 393.7x354.33 smd: 0(196,-127)
  rect 39.37x157.48 smd: 1(63,-640) 2(131,-640) 3(197,-638) 4(264,-639) 5(331,-635)
  silkscreen extent 0,-444 394,0, body extent -4,-630 396,-54, height 180
TP-1.5 [mm]
  round 1.2 smd: 1(0,0)
WRB1205MH [mm]
  round 3 hole 1.5: 1(2.362,16.027) 2(2.388,11.252) 3(23.089,23.139) 4(23.089,2.134)
  silkscreen extent 0,0 25.5,25.53
WSON8 [mm]
  rect 1x0.45 smd: 1(-3.975,1.905) 2(-3.975,0.635) 3(-3.975,-0.635) 4(-3.975,-1.905) 5(3.975,-1.905) 6(3.975,-0.635) 7(3.975,0.635) 8(3.975,1.905)
  rect 3.5x4.4 smd: 9(0,0)
  silkscreen extent -4.8,-3.05 4.1,3.05
XTAL3225 [mm]
  rect 1.3x1.05 smd: 1(0,0) 2(2.3,0) 3(2.3,1.85) 4(0,1.85)
  silkscreen extent -1.14,-0.33 2.74,2.17
汽车保险丝座子 [mm]
  rect 2.7x1.3 hole 0.7 slot 2.1 at 0 deg: 1(2.743,-5.207) 1(2.743,-1.651) 2(17.424,-1.651) 2(17.475,-5.207)
  silkscreen extent 0,-6.8 19.8,0
电感-10*10 [mil]
  rect 157.48x196.85 smd: 1(-260,-9) 2(253,-12)
  silkscreen extent -248,-247 243,243, body extent -246,-246 246,246, height 272

## Part data
3V3 5V: library part TEST-POINT, "测试点"
"12V OUT" Horn MidLeftLight MidRightLight PowerIN WarningLight: library part "Header 2", "Header, 2-Pin"
12VOUT SWD TailLeftLight TailRightLight: library part "Header 5", "Header, 5-Pin"
AnlogInput: library part "Header 3X2", "Header, 3-Pin, Dual row"
Bumper1 Bumper2 Encoder1 Encoder2 Encoder3 Encoder4 HeadLeftLight HeadRightLight: library part "Header 4", "Header, 4-Pin"
C1 C2 C3 C4 C5 C6 C7 C8 C9 C10 C11 C12 C13 C14 C15 C16 C17 C18 C19 C20 C21 C22 C23 C24 C25 C26 C27 C28 C29 C30 C31 C32 C33 C34 C35 C36 C37 C38: library part C
CAN1 CAN2: "Header, 2-Pin"
Cap1 Cap2 Cap3 Cap4 Cap5 Cap6 Cap21 Cap22: library part CAP
COM232: library part DB9
D1 D2 D3 D4 D5 D6 D7 D8 D9 D10 D11: library part D
DS0 Power: library part LED2, "Typical RED, GREEN, YELLOW, AMBER GaAs LED"
F1 F2 F3 F4 F5 F6 F7 F8 F9 F10: library part 保险丝
IO: library part "Header 6X2", "Header, 6-Pin, Dual row"
L1: "Adjustable Inductor"
LIN1 LIN2: library part "Header 3", "Header, 3-Pin"
Q1 Q2 Q3 Q4 Q5 Q6 Q7 Q8 Q9 Q10: library part NPN, "8050/BCW846/BCW847"
R1 R2 R3 R4 R5 R6 R7 R8 R9 R10 R11 R12 R13 R14 R15 R16 R17 R18 R19 R20 R21 R22 R23 R24 R25 R26 R27 R28 R29 R30 R31 R32 R33 R34 R35 R36 R37 R38 R39 R40 R41 R42 R43 R44 R45 R46 R47 R48 R49 R50 R51 R52 R53 R54 R55 R56 R57 R58 R59 R60 R61 R62 R63 R64 R65 R66 R67 R68 R69 R70 R71 R72 R73 R74 R75 R76 R77 R78 R79 R80 R81 R82 R83 R84 R85 R86 R87 R88 R89 R90 R91 R92 R93 R94 R95 R96 R97 R98 R99 R100 R101 R102 R103 R104: library part R
U2: library part W25Q128, "W25Q128"
U3: library part MAX3232
U4 U5: library part SN65HVD230D
U6 U11: library part AMS1117
Y1: library part XTAL_3225, "3225贴片无源晶振"

## Free pads (board coordinates)
  round 157.48 hole 157.48: 0(196.85,393.7) 0(196.85,5118.11) 0(6064.85,1328) 0(6064.85,4535.7) 0(9645.67,393.7) 0(9645.67,5118.11)

## Via types
v1: diameter 25, hole 20, Top Layer to Bottom Layer, 133 vias
v2: diameter 15, hole 10, Top Layer to Bottom Layer, 111 vias

## Nets (pads, with @x,y where several pads share a name; then routed paths per layer and width w, separated by ;. In a path a pad name is that pad's centre, name@x,y a point inside that pad or via, vN(x,y) a via of type N, cw(c..) or ccw(c..) an arc to the next point about the centre after c; other vN are vias at no path point)
3V3: 3V3.1 C26.2 C32.2 Cap2.1 J15.1 J16.1 J17.1 J18.1 J19.1 J20.1 J21.1 J22.1 J29.1 J30.1 R14.2 R16.2 R18.2 R20.2 R22.2 R24.2 R26.2 R28.2 R29.2 R31.2 R33.2 R35.2 R37.2 R39.2 R83.1 R84.1 R89.1 R90.1 R91.1 R92.1 U3.16 U6.2 U6.4 | length 2154.9
  Top Layer w10: U3.16@1179.86,4665 C26.2@1269.03,4665
  Top Layer w30: R92.1@630,3477 v1(665,3477) ; R91.1@850,3477 v1(881,3477) ; R90.1@975,3472 v1(1006,3472) ; U3.16@1179.86,4667.5 C26.2@1275.06,4667.5 ; v1(1841,4402) 1864.06,4425.06 R35.2@1902.5,4425.06 ; v1(2093,4394) 2124.06,4425.06 R37.2@2152.5,4425.06 ; v1(2333,4396) 2362.06,4425.06 R39.2@2372.5,4425.06 ; v1(2617,4400) 2642.06,4425.06 R29.2@2667.5,4425.06 ; v1(2858,4397) 2886.06,4425.06 R31.2@2897.5,4425.06 ; v1(3069,4394) 3100.06,4425.06 R33.2@3127.5,4425.06 ; v1(3694.94,4343.94) R14.2@3694.94,4377.5 ; v1(4034.94,4338.06) R16.2@4034.94,4382.5 ; U6.2@4095.03,3624.94 v1(4095.03,3864.94) 4385.06,3864.94 Cap2.1@4415,3835 4527.56,3835 C32.2@4605.06,3757.5 4605.06,3919.94 3V3.1@4605,3920 ; v1(4589.94,4344.94) R18.2@4589.94,4382.5 ; v1(4889.94,4332.94) R20.2@4889.94,4377.5 ; v1(5444.94,4339.06) R22.2@5444.94,4382.5 ; v1(5704.94,4339.06) R24.2@5704.94,4387.5 ; v1(6304.94,4322.94) R26.2@6304.94,4377.5 ; v1(6584.94,4337.94) R28.2@6584.94,4387.5 ; v1(8348,3120) R84.1@8413,3120 ; v1(8352,2840) R83.1@8413,2840 ; v1(8357,3005) R89.1@8413,3005
  other v1: 2963,1871 5261,1876 1824,1879 7582,1879 8732,1879 669,1880 4132,1890 6424,1890 9499,3630 8575,3635 4607,3833 4416,3874 1843,4404 1238,4665
5V: 5V.1 C31.2 C35.1 C36.2 Cap1.1 Cap6.1 Cap21.1 U4.3 U5.3 U6.3 U7.4 U11.3 | length 1035.8
  Top Layer w30: Cap6.1@3455,3655 U7.4@3700,3410 ; U7.4@3712,3410 5V.1@3860,3410 ; U6.3@4195.03,3624.94 4195.03,3562.47 C31.2@4137.5,3504.94 4215,3427.44 Cap1.1@4215,3330 ; C36.2@7125,4507.44 U4.3@7125,4590 ; U5.3@7680,4600 7680,4502 C35.1@7687,4495
  other v1: 4254,2445 4178,2448 4195,2657 4195,2741 4215,3391 4182,3467 7682,4537 7124,4541
5V_2: C34.2 Cap4.1 J15.4 J16.4 J17.4 J18.4 J19.4 J20.4 J21.4 J22.4 J29.4 J30.4 L1.2 R85.2 R86.2 R87.2 R88.2 R93.2 R94.2 R95.2 R96.1 U8.4 U9.8 U10.8 | length 1373.5
  Top Layer w30: U10.8@835,2590.51 857,2568.51 R96.1@857,2495 ; R95.2@919.94,2902.5 v1(927,2895.44) ; C34.2@1992.5,3635.06 1910,3552.56 Cap4.1@1910,3465 1910,3186 1947,3149 U8.4@2094,3149 2328,3149 L1.2@2492,3313 ; U9.8@9302.72,3013.15 9322.07,3032.5 R87.2@9405.06,3032.5
  other v1: 3199,1869 9035,1879 946,1880 2086,1880 7889,1881 5535,1882 6723,1890 4430,1892 857,2545 818,2893 666,2895 8999,2922 8987.5,3009.94 9363,3034 8996,3118 2370,3192 1910,3315 9224,3630 8330,3635
12V: 12VOUT.2 12VOUT.3 12VOUT.4 12VOUT.5 C33.2 Cap3.1 Cap5.1 Encoder1.1 Encoder2.1 Encoder3.1 Encoder4.1 J1.1 J2.1 J3.1 J4.1 J5.1 J6.1 J7.1 J8.1 J9.1 J10.1 J11.1 J12.1 J13.1 J14.1 LIN1.1 LIN2.1 PowerIN.2 R43.2 R48.2 R52.2 R56.2 R60.2 R64.1 R68.2 R72.1 R74.2 R75.2 R76.2 R77.2 R78.2 R79.2 R80.2 R81.2 R100.1 R104.2 Relay1.1 Relay2.1 Relay3.1 Relay4.1 Relay5.1 Relay6.1 Relay7.1 Relay8.1 Relay9.1 Relay10.1 U7.2 U8.1 | length 4613.7
  Top Layer w30: U8.1@2095,2948 2180,2863 Cap3.1@2180,2670 2180,2557.44 C33.2@2102.5,2479.94 ; Cap5.1@3352,2343 U7.2@3352,2594 ; J1.1@3695,4800.75 ccw(c3695,4858.25) 3752.5,4858.25 R77.2@3752.5,4965.06 ; J2.1@4035,4800.75 ccw(c4035,4863.25) 4097.5,4863.25 R78.2@4097.5,4965.06 ; J3.1@4590,4800.75 ccw(c4590,4873.25) v1(4662.5,4873.25) R74.2@4662.5,4965.06 ; J4.1@4890,4800.75 ccw(c4890,4883.25) 4972.5,4883.25 R79.2@4972.5,4965.06 ; J5.1@5445,4800.75 ccw(c5445,4858.25) 5502.5,4858.25 R75.2@5502.5,4965.06 ; J6.1@5700,4800.75 ccw(c5700,4883.25) 5782.5,4883.25 R80.2@5782.5,4965.06 ; 6310,4723 J7.1@6310,4800.75 ccw(c6310,4873.25) 6382.5,4873.25 R76.2@6382.5,4965.06 ; 6580,4723 J8.1@6580,4800.75 ccw(c6580,4878.25) 6657.5,4878.25 R81.2@6657.5,4965.06
  Bottom Layer w30: R43.2@892.5,1410.06 924,1441.56 Relay1.1@924,1593 ; R48.2@2047.5,1410.06 2076.14,1438.71 Relay2.1@2076.14,1593 ; R52.2@3202.5,1410.06 3228.29,1435.85 Relay3.1@3228.29,1593 ; R56.2@4357.5,1410.06 4380.43,1432.99 Relay4.1@4380.43,1593 ; R60.2@5512.5,1410.06 5532.57,1430.14 Relay5.1@5532.57,1593 ; R64.1@6667,1410.13 6684.71,1427.84 Relay6.1@6684.71,1593 ; R68.2@7822.5,1410.06 7836.86,1424.42 Relay7.1@7836.86,1593 ; Relay10.1@8236,3932 8220,3948 8220,4037.44 R104.2@8317.5,4134.94 ; R72.1@8977,1410.13 8989,1422.13 Relay8.1@8989,1593 ; Relay9.1@9161,3932 9161,4060 9245,4144 R100.1@9248,4144
  other v1: 2130,2666 2228,2666 2178,2827 2132,2946 1938,4818 2207,4820 2424,4820 2711,4821 2941,4822 3185,4822 3752.5,4871 4096,4872 4974,4878 5502,4891 5782,4905 6380,4910 6658,4925
A1: Encoder1.2 R13.1 R77.1 | length 327
  Top Layer w30: R13.1@3612,4965 3681,4965 ; R77.1@3698,4965 3681,4965 ; Encoder1.2@3715.6,5189 3698,5171.4 3698,4982 cw(c3681,4982) 3681,4965
A2: Encoder2.2 R17.1 R74.1 | length 305.7
  Top Layer w30: Encoder2.2@4525.4,5189 4525.4,4966.6 R17.1@4527,4965 ; R17.1@4527,4965.13 R74.1@4608,4965.13
A3: Encoder3.2 R21.1 R75.1 | length 309.3
  Top Layer w30: Encoder3.2@5335.2,5189 5382,5142.2 R21.1@5382,4965 ; R21.1@5382.13,4965.13 R75.1@5448,4965.13
A4: Encoder4.2 R25.1 R76.1 | length 350.1
  Top Layer w30: Encoder4.2@6145,5189 6242,5092 R25.1@6242,4965 ; R25.1@6242.13,4965.13 R76.1@6328,4965.13
B1: Encoder1.3 R15.1 R78.1 | length 340
  Top Layer w30: Encoder1.3@3907.09,5181.09 Encoder1.3@3913,5187 ; Encoder1.3@3911.6,5189 3952,5148.6 3952,4965.13 R78.1@4043,4965.13
B2: Encoder2.3 R19.1 R79.1 | length 355.6
  Top Layer w30: Encoder2.3@4721.4,5189 4832.13,5078.27 4832.13,4965.13 R79.1@4918,4965.13
B3: Encoder3.3 R23.1 R80.1 | length 349.9
  Top Layer w30: Encoder3.3@5531.2,5189 5652,5068.2 R23.1@5652,4965 ; R23.1@5652.13,4965.13 R80.1@5728,4965.13
B4: Encoder4.3 R27.1 R81.1 | length 410.3
  Top Layer w30: Encoder4.3@6341,5189 6341,5160 6388,5160 6517,5031 R27.1@6517,4965 ; R27.1@6517.13,4965.13 R81.1@6603,4965.13
B10: IO.1 U1.79 | length 573.3
  Top Layer w10: U1.79@6735.61,2657.22 6735.61,2550.39 6807,2479 7007,2479 IO.1@7124,2362
B11: IO.2 U1.80 | length 493.2
  Top Layer w10: U1.80@6755.3,2657.22 6755.3,2582.7 6837,2501 7085,2501 IO.2@7124,2462
BOOT0: R2.1 U1.166 | length 83.5
  Top Layer w10: U1.166@6263,3666.49 R2.1@6263,3750
BOOT1: R3.1 U1.58 | length 118.1
  Top Layer w10: R3.1@6284,2555 6322.22,2593.22 U1.58@6322.22,2657.22
BREAKLIGHT: F6.2 TailLeftLight.3 TailRightLight.3 | length 1846.5
  Top Layer w80: F6.2@6978,804 6978,415 TailLeftLight.3@7076,317 ; F6.2@6980,664 7280,664 7387,557 7982,557 8068,471 TailRightLight.3@8068,320
C0: AnlogInput.1 U1.32 | length 854.7
  Top Layer w10: AnlogInput.1@5182,2926 5226,2970 5315,2970 5353,2932 5887,2932 5929.76,2974.76 U1.32@5985,2974.76
C1: AnlogInput.2 U1.33 | length 708.6
  Top Layer w10: AnlogInput.2@5293,2915 5897,2915 5937.08,2955.08 U1.33@5985,2955.08
C2: AnlogInput.3 U1.34 | length 848.3
  Top Layer w10: AnlogInput.3@5182,2826 5227,2871 5292,2871 5319,2898 5905,2898 5942.39,2935.39 U1.34@5985,2935.39
C3: AnlogInput.4 U1.35 | length 740.2
  Top Layer w10: AnlogInput.4@5282,2826 5337,2881 5912.04,2881 5946.75,2915.71 U1.35@5985,2915.71
C8: U1.117
C9: U1.118
C10: U1.139
C11: U1.140
C12: U1.141
C13: U1.8
DRIVINGLIGHT: F5.2 TailLeftLight.4 TailRightLight.4 | length 3200
  Top Layer w80: TailLeftLight.4@7252,317 7252,347 7362,457 7497,457 7557,397 7557,220 7634,143 8188,143 8244,199 TailRightLight.4@8244,320
  Bottom Layer w80: F5.2@5831,804 5831,579 5916,494 7075,494 TailLeftLight.4@7252,317
F_CS_F6: U1.24 U2.1 | length 899.4
  Top Layer w10: U2.1@5263.5,3066 5232,3066 5221,3077 5221,3124 5234,3137 5302,3137 5315,3124 5376,3124 5417,3165 5897,3165 5929.76,3132.24 U1.24@5985,3132.24
GND: AnlogInput.5 C1.1 C2.1 C3.1 C4.1 C5.1 C6.1 C7.1 C8.1 C9.1 C10.1 C11.1 C12.1 C13.1 C14.1 C15.1 C16.2 C17.2 C18.2 C19.2 C20.2 C21.1 C22.1 C23.2 C24.2 C25.2 C26.1 C28.2 C30.2 C31.1 C32.1 C35.2 C36.1 Cap1.2 Cap2.2 Cap6.2 Cap21.2 Cap22.2 COM232.5 IO.7 IO.9 IO.11 J1.3 J2.3 J3.3 J4.3 J5.3 J6.3 J7.3 J8.3 J9.3 J10.3 J11.3 J12.3 J13.3 J14.3 J24.3 J26.3 Power.2 R2.2 R3.2 R8.2 RST.2 SWD.5 U1.14 U1.22 U1.37 U1.61 U1.71 U1.90 U1.102 U1.113 U1.126 U1.135 U1.148 U1.158 U2.4 U3.15 U4.2 U4.8 U5.2 U5.8 U6.1 U7.3 U11.1 Y1.2 Y1.4 | length 5198.2
  Top Layer w10: C16.2@5605.06,3047.5 5684.67,3047.5 Y1.4@5695,3057.83 ; Y1.2@5793.05,2992.5 C17.2@5864.94,2992.5 ; C15.1@5800,3347 C6.1@5875,3347 5892.91,3329.09 v2(5900,3329.09) U1.14@5985,3329.09 ; C22.1@5809,2442 C21.1@5899,2442 ; C23.2@5827.5,2725.06 C24.2@5827.5,2795.06 ; U1.37@5985,2876.34 v2(6029.66,2876.34) ; U1.22@5985,3171.61 6032.61,3171.61 v2(6044,3183) ; R8.2@6091.94,2497.5 6148.5,2497.5 C3.1@6206,2555 ; U1.61@6381.28,2657.22 6381.28,2573.72 C10.1@6400,2555 ; U1.158@6420.65,3666.32 6420.65,3728.65 v2(6442,3750) C14.1@6442,3814 ; C11.1@6554,2399 C4.1@6554,2488 C13.1@6554,2554 6578.13,2578.13 U1.71@6578.13,2657.22 ; U1.148@6617.5,3666.32 6617.5,3735.5 v2(6632,3750) ; U1.135@6873.41,3666.32 6873.41,3741.41 C1.1@6887,3755 ; U1.90@6994.09,2758.23 7089.77,2758.23 C9.1@7105,2743 ; U1.102@6994.09,2994.45 7105.55,2994.45 C8.1@7127,2973 ; U1.113@6994.09,3210.98 7087.02,3210.98 C12.1@7095,3203 ; U1.126@6994.09,3466.89 7043.89,3466.89 v2(7084,3507) 7086,3509 C7.1@7129,3509 7191.5,3446.5 C20.2@7191.5,3445.94
  Top Layer w30: v1@787.5,4307.5 C30.2@834.94,4307.5 ; v1(797.5,4732.5) C28.2@835.06,4732.5 ; U3.15@1177.36,4615 1270.17,4615 cw(c1270.17,4608.17) C26.1@1275,4613 1341,4613 1375,4647 1375,4788 COM232.5@1263,4900 ; U7.3@2884,3409 2988.76,3409 Cap6.2@3234.76,3655 ; U11.1@3990.03,2694.94 3990.03,2604.97 ; Cap21.2@3994.76,2450 3990.03,2454.73 3990.03,2604.97 ; Cap1.2@3994.76,3330 3994.76,3416.76 C31.1@4083,3505 3995.03,3592.97 U6.1@3995.03,3624.94 ; Cap22.2@4390,2679.76 4291.24,2581 4014,2581 3990.03,2604.97 ; Cap2.2@4415,3614.76 4516.76,3614.76 C32.1@4605,3703 ; U2.4@5263.5,3216 5266,3218.5 C25.2@5347.06,3218.5 ; U4.8@7025,4814.41 7025,4711 7075,4661 U4.2@7075,4590 7075,4512 C36.1@7068,4505 ; U5.8@7580,4824.41 7580,4736 7630,4686 U5.2@7630,4600 7630,4497.56 C35.2@7632.5,4495.06
  other v1: 3991,2530 4256,2580 8538,3170 5306,3218 971,3332 4040,3548 4415,3575 4417,3656 792,4307.5 7064,4534 7632,4539 6531,4544 6261,4545 3645,4546 3985,4546 2889,4547 4538,4547 4840,4547 5394,4547 2660,4548 3135,4548 5648,4548 2375,4549 1890,4550 2155,4551
  other v2: 5854,2442 5388,2546 6345,2547 6216,2555 6380,2597 6577,2605 7056,2757 5826,2758 6827.5,2808.06 5831,2992.5 7089,2993 5644.86,3047.5 7054,3210 5835,3347 5081.5,3401.06 4941,3525 6873.41,3722 6264.06,3804.5
H4: R44.1 U1.45 | length 6029
  Top Layer w10: R44.1@595,1892 595,1943 711,2059 4064,2059 4233,2228 5997,2228 6025,2256 6025,2593 6066.32,2634.32 U1.45@6066.32,2657.22
H5: R45.1 U1.46 | length 4889.8
  Top Layer w10: R45.1@1745,1887 1871,2013 4064,2013 4249,2198 6019,2198 6057,2236 6057,2585 6086,2614 U1.46@6086,2657.22
H6: IO.3 U1.83 | length 636.5
  Top Layer w10: U1.83@6814.35,2657.22 6814.35,2573.65 6863,2525 7156,2525 7180,2501 7180,2406 IO.3@7224,2362
H7: IO.4 U1.84 | length 543.6
  Top Layer w10: U1.84@6834.04,2657.22 6834.04,2591.96 6878,2548 7197,2548 7224,2521 IO.4@7224,2462
H8: IO.5 U1.85 | length 696.2
  Top Layer w10: U1.85@6853.72,2657.22 6853.72,2600.28 6887,2567 7239,2567 7274,2532 7274,2412 IO.5@7324,2362
H9: IO.6 U1.86 | length 616.8
  Top Layer w10: U1.86@6873.41,2657.22 6873.41,2606.59 6886,2594 7287,2594 7324,2557 IO.6@7324,2462
HIGHLIGHT: F1.2 HeadLeftLight.4 HeadRightLight.4 | length 4502.4
  Bottom Layer w80: F1.2@1201,807.72 1201,669.72 F1.2@1203,667.72 1397.72,473 3389,473 3493,369 HeadLeftLight.4@3493,277 3585,277 3748,114 5055,114 HeadRightLight.4@5215,274
HORN: F8.2 Horn.2 | length 1019.4
  Top Layer w100: F8.2@9282,804 9282,295 Horn.2@9283,294
  Bottom Layer w100: Horn.2@9282,295 F8.2@9282,804
JTCK: R12.1 SWD.4 U1.137 | length 1927.3
  Top Layer w10: v2(6834.04,3589.96) U1.137@6834.04,3666.32 ; v2(7129,3313) 7715,3313 7770,3258 7770,2968 7725,2923 SWD.4@7687,2923
  Top Layer w30: R12.1@7365,2923 SWD.4@7687,2923
  Bottom Layer w10: v2(6834.04,3589.96) 6858,3566 6921,3566 6974,3513 6974,3404 7065,3313 v2(7129,3313)
JTMS: R11.1 SWD.3 U1.124 | length 1379.6
  Top Layer w10: v2(6931,3407) 6951.52,3427.52 U1.124@6994.09,3427.52 ; v2(7148,3280) 7530,3280 7583,3227 7583,3067 7632,3018
  Top Layer w30: R11.1@7363,3018 7632,3018 SWD.3@7687,3018
  Bottom Layer w10: v2(6931,3407) 6931,3359 7007,3283 7145,3283 v2(7148,3280)
LED0_B1: DS0.2 U1.57 | length 1390.5
  Top Layer w10: DS0.2@5490.06,2537.04 5530.96,2537.04 5561,2507 v2(5561,2346) ; U1.57@6303,2657.68 v2(6303,2703)
  Bottom Layer w10: v2(5561,2346) 5595,2312 6224,2312 6303,2391 v2(6303,2703)
LEFTLIGHT: F3.2 HeadLeftLight.2 MidLeftLight.2 TailLeftLight.5 | length 5504.4
  Top Layer w80: HeadLeftLight.2@2983,277 2983,364 3286,667 3530,667 F3.2@3530,805 ; MidLeftLight.2@5968,314 5968,254 6107,115 7229,115 TailLeftLight.5@7431,317
  Bottom Layer w80: F3.2@3530,805 3530,625 3694,461 5377,461 5677,161 5933,161 5968,196 MidLeftLight.2@5968,314
LOWLIGHT: F2.2 HeadLeftLight.3 HeadRightLight.3 | length 3423
  Top Layer w80: F2.2@2359,665 2359,315 2556,118 3172,118 ; HeadLeftLight.3@3239,277 3239,185 3172,118 ; HeadRightLight.3@4961,274 4805,118 3172,118
  Bottom Layer w80: F2.2@2357,667 F2.2@2357,805
MCU_3V3: AnlogInput.6 C1.2 C2.2 C3.2 C4.2 C5.2 C6.2 C7.2 C8.2 C9.2 C10.2 C11.2 C12.2 C13.2 C14.2 C15.2 C25.1 Cap22.1 IO.8 IO.10 IO.12 R1.2 R4.2 R5.2 R6.2 R7.1 R9.2 R10.1 R11.2 R12.2 SWD.1 U1.15 U1.23 U1.36 U1.49 U1.62 U1.72 U1.82 U1.91 U1.103 U1.114 U1.127 U1.136 U1.149 U1.159 U1.172 U2.3 U2.7 U2.8 U11.2 U11.4 | length 2522.6
  Top Layer w10: U2.8@4950.5,3066 U2.7@4950.5,3116 ; C15.2@5799.94,3292.5 C6.2@5874.94,3292.5 v2(5901.5,3292.5) 5918.41,3309.41 U1.15@5985,3309.41 ; U1.36@5985,2896.02 v2(6042.98,2896.02) ; U1.23@5985,3151.93 v2(6044.93,3151.93) ; C3.2@6145.06,2561.5 U1.49@6145.06,2657.22 ; U1.172@6145.06,3666.32 6145.06,3718.06 v2(6148,3721) ; C14.2@6387.5,3814.06 C5.2@6387.5,3750.06 6400.96,3736.6 U1.159@6400.96,3666.32 ; U1.62@6400.96,2657.22 6400.96,2612.04 6454.5,2558.5 C10.2@6454.5,2554.94 ; C2.2@6577.5,3750.06 6597.82,3729.75 U1.149@6597.82,3666.32 ; v2@6597.82,2595 U1.72@6597.82,2657.22 ; C11.2@6608.5,2398.94 C4.2@6608.5,2487.94 C13.2@6608.5,2553.94 ; U1.82@6794.67,2657.22 v2(6794.67,2725.67) ; C1.2@6832.5,3755.06 6853.72,3733.84 U1.136@6853.72,3666.32 ; U1.91@6994.09,2777.91 7085.48,2777.91 C9.2@7105.06,2797.5 ; U1.103@6994.09,3014.13 7102.13,3014.13 C8.2@7115.5,3027.5 ; U1.114@6994.09,3230.67 7068.23,3230.67 C12.2@7095.06,3257.5 ; U1.127@6994.09,3486.57 7036,3486.57 7112.92,3563.5 C7.2@7129.06,3563.5
  Top Layer w30: U11.2@4090.03,2694.94 U11.4@4090.03,2934.94 4355.06,2934.94 Cap22.1@4390,2900 ; U2.3@5265.5,3164 C25.1@5347,3164 ; R12.2@7308.5,2921.06 R11.2@7308.5,3018.06
  other v1: 4176,2934.94 4251,2935 4316,2934.94 7308,2970 5308,3164
  other v2: 5395,2293 5490,2293 5970,2431 6151.5,2555.06 6617,2560 6426,2587 6600,2595 5827,2640 7091,2786 7120,3028 4950.5,3092 7076,3241 5838,3293 5818,3490 5411.5,3525.94 7096,3544 5819,3677 6597,3717 6847.56,3740 6388,3783
"Net12V OUT_1": "12V OUT.1" F10.2 | length 917
  Top Layer w100: F10.2@7939,4760 7939,5029 8073,5163
  Bottom Layer w100: F10.2@7939,4760 7939,5029 8073,5163
NetBumper1_2: Bumper1.2 R40.1 | length 292.1
  Top Layer w30: Bumper1.2@2286,5203 2397.71,5091.29 cw(c2327,5020.58) 2427,5020.58 R40.1@2427,4965
NetBumper1_3: Bumper1.3 R38.1 | length 284.2
  Top Layer w30: Bumper1.3@2090,5203 2182.71,5110.29 cw(c2112,5039.58) 2212,5039.58 R38.1@2212,4965
NetBumper1_4: Bumper1.4 R36.1 | length 245.5
  Top Layer w30: Bumper1.4@1914,5203 cw(c1846.4,5135.4) 1942,5135.4 R36.1@1942,4965
NetBumper2_2: Bumper2.2 R34.1 | length 275.6
  Top Layer w30: Bumper2.2@3095.8,5207 3177,5125.8 R34.1@3177,4965
NetBumper2_3: Bumper2.3 R32.1 | length 247
  Top Layer w30: Bumper2.3@2899.8,5207 2937.6,5169.2 R32.1@2937.6,4975.62
NetBumper2_4: Bumper2.4 R30.1 | length 266.5
  Top Layer w30: R30.1@2717,4965 2717,5200.2 Bumper2.4@2723.8,5207 ; Bumper2.4@2746.29,5187.69 Bumper2.4@2761.6,5203
NetC16_1: C16.1 U1.30 Y1.1 | length 451
  Top Layer w10: C16.1@5605,2993 5613,2985 Y1.1@5695,2985 5695,2965 5711,2949 5876,2949 5907,2980 5907,3004 5917.13,3014.13 U1.30@5985,3014.13
NetC17_1: C17.1 U1.29 Y1.3 | length 209.4
  Top Layer w10: Y1.3@5785.55,3057.83 5854.17,3057.83 C17.1@5865,3047 5878.18,3033.82 U1.29@5985,3033.82